# EAGLE board SMPS board (EAGLE 9.6.2)
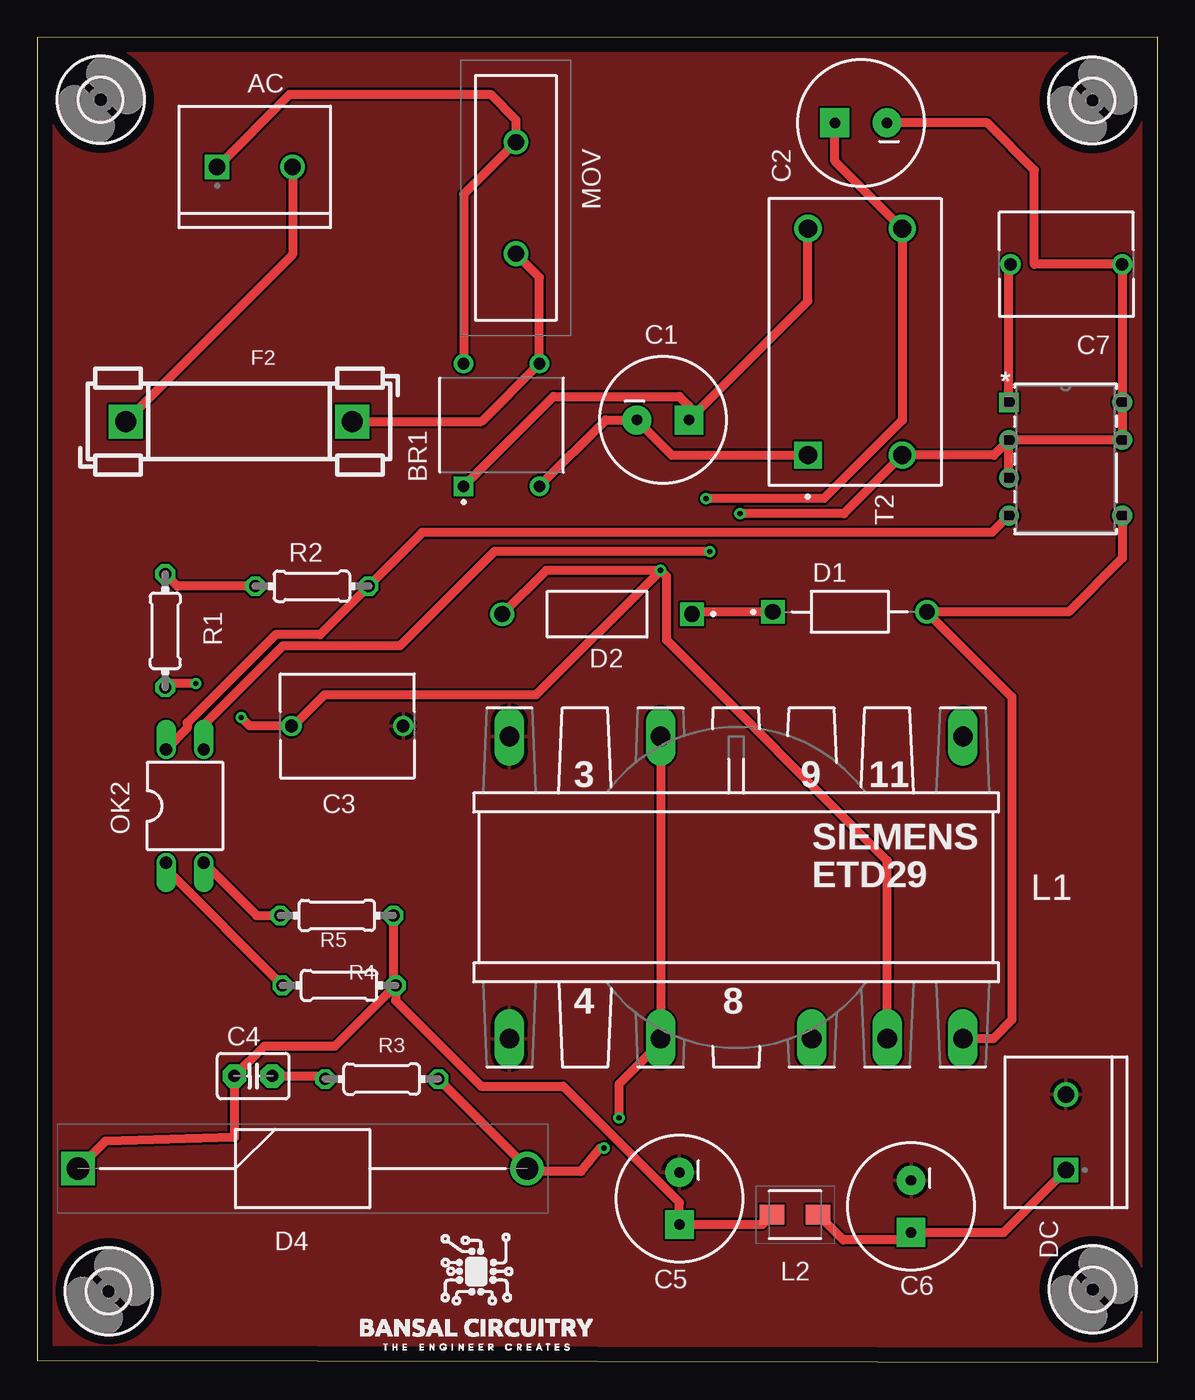
[diagram p0: board, top side]
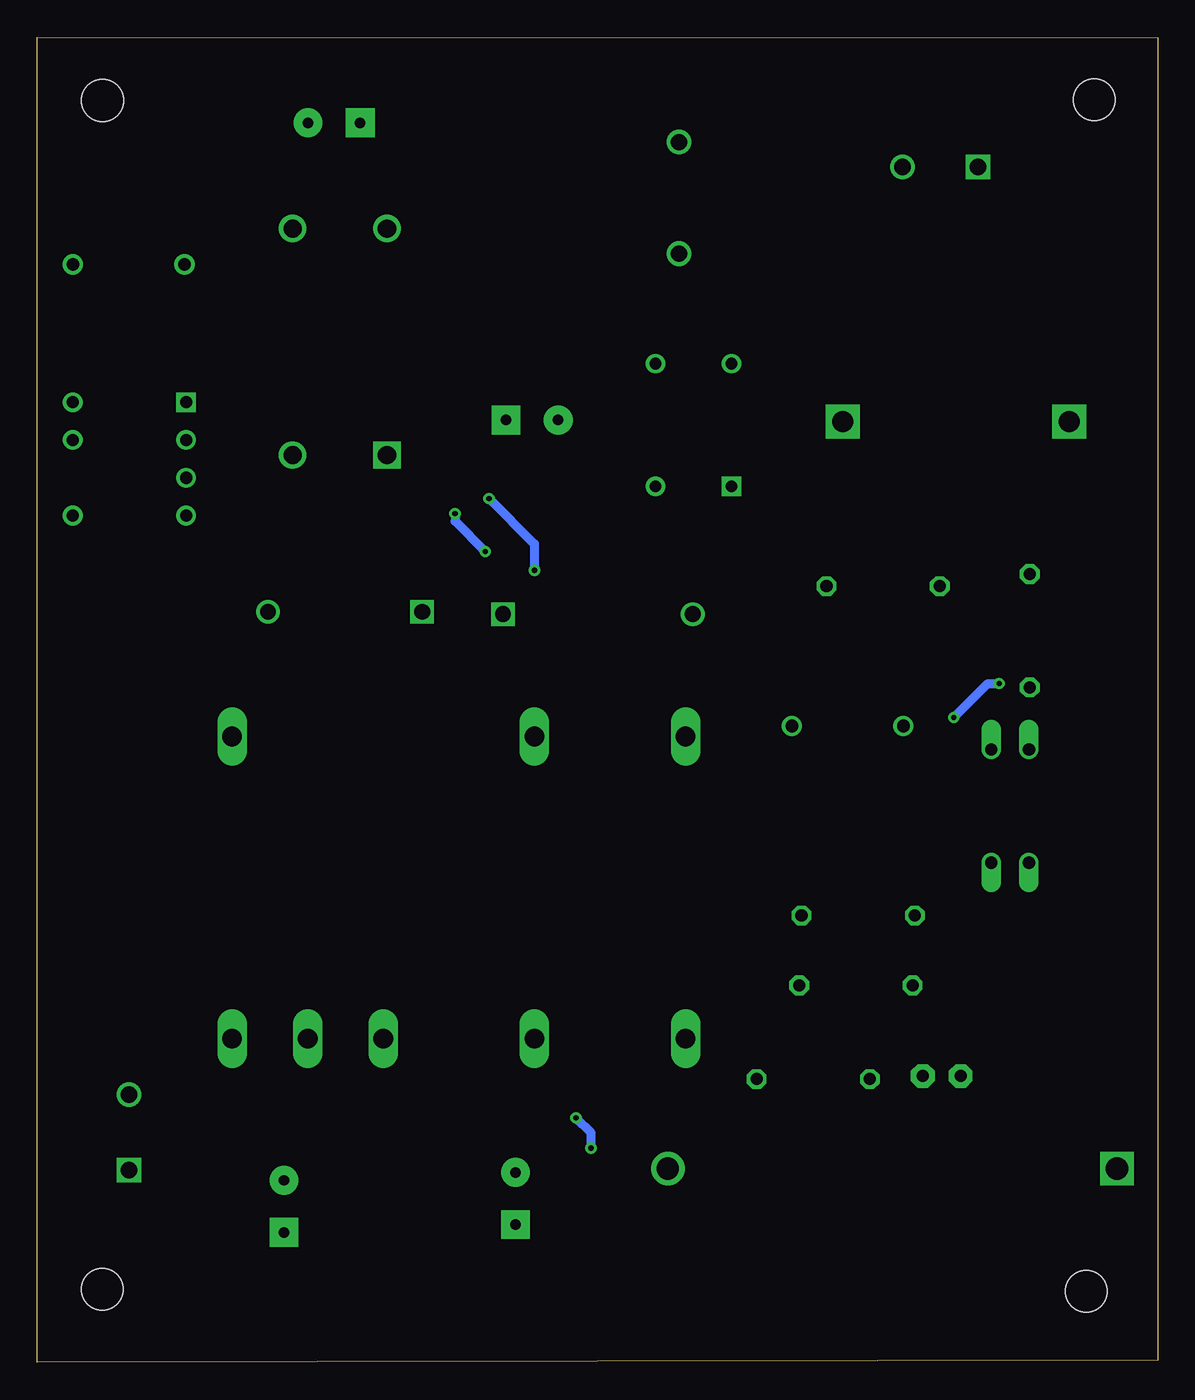
[diagram p1: board, bottom side, seen from below]

Size 75.34 x 89.12 mm. Coordinates in mm from the lower left corner, seen from the top.
Outline: 0,0.13 75.34,0 75.34,89.12 0,89.07 0,0.13
Copper layers (1*16): Top 0.035mm / dielectric 1.5mm / Bottom 0.035mm
Design rules "default": minimum track width 6mil, minimum drill 0.35mm, track to track 6mil, track to pad 6mil, pad to pad 6mil, via to via 6mil, smd to smd 6mil, copper to edge 40mil, drill to drill 6mil, minimum pad ring 10mil, minimum via ring 8mil, stop-mask expansion 4mil, vias tented up to drill 0mil, thermal gap 10mil

## Footprints (pad centres in the part's own frame; a part is rotated, then mirrored left to right if it is on the bottom)
TE_282837-2 = drill 1.1 square: 1 -2.54,0 | drill 1.1: 2 2.54,0
DIP825W50P509L880H320Q4 = drill 0.79 pad 1.14 square: 1 -4.125,2.55 | drill 0.79 pad 1.14: 2 -4.125,-2.55; 3 4.125,-2.55; 4 4.125,2.55
CPOL-RADIAL-1F-2.7V = drill 0.7 pad 1.93 square: + 1.75,0 | drill 0.7 pad 1.93: - -1.75,0
CAP_DE6E3KJ222MN3A = drill 0.85 pad 1.28: 1 -3.75,0; 2 3.75,0
C2.5-3 = drill 0.813 pad 1.6 octagon: 1 -1.27,0; 2 1.27,0
DIOAD1036W78L520D274 = drill 1.06: A 5.18,0 | drill 1.06 square: C -5.18,0
DIOAD1276W78L760D360 = drill 1.06: A 6.38,0 | drill 1.06 square: C -6.38,0
DIOAD3020W130L900D530 = drill 1.5 pad 2.25 square: 1 0,0 | drill 1.5 pad 2.25: 2 30.2,0
FUSE_HOLDER_5X20MM = drill 1.422 pad 2.286 square: 1 0,0; 2 15.24,0
2,8 = hole 2.8: 0,0
ST-D2 = drill 1.321 long: 1 -15.24,10.16; 2 -15.24,-10.16; 5 -5.08,10.16; 6 -5.08,-10.16; 10 5.08,-10.16; 12 10.16,-10.16; 13 15.24,10.16; 14 15.24,-10.16
INDPM3532X200N = smd 1.65 x 1.3: 1 -1.55,0; 2 1.55,0
MOV14D471K = drill 1.1 pad 1.65: 1 -3.75,0; 2 3.75,0
DIL04 = drill 0.813 offset: 1 -1.27,-3.81; 2 1.27,-3.81; 3 1.27,3.81; 4 -1.27,3.81
0204/7 = drill 0.813 octagon: 1 -3.81,0; 2 3.81,0
XFMR_HCTC-4-1.7 = drill 1.219 pad 1.829 square: 1 -7.62,3.175 | drill 1.219 pad 1.829: 2 -7.62,-3.175; 3 7.62,-3.175; 4 7.62,3.175
PDIP-8B_P_PWI = drill 0.813 pad 1.321 square: 1 0,0 | drill 0.813 pad 1.321: 2 0,-2.54; 3 0,-5.08; 4 0,-7.62; 5 7.62,-7.62; 7 7.62,-2.54; 8 7.62,0

## Placement (x,y rotation side)
AC  282837-2  [TE_282837-2]  14.63,80.39 0 top
BR1  DB107  [DIP825W50P509L880H320Q4]  31.22,63.04 90 top
C1  22uF  [CPOL-RADIAL-1F-2.7V]  42.06,63.37 0 top
C2  10uF  [CPOL-RADIAL-1F-2.7V]  55.37,83.36 180 top
C3  472M,2Kv  [CAP_DE6E3KJ222MN3A]  20.85,42.8 0 top
C4  560pF  [C2.5-3]  14.53,19.25 180 top
C5  1500uF  [CPOL-RADIAL-1F-2.7V]  43.18,11.02 270 top
C6  100uF  [CPOL-RADIAL-1F-2.7V]  58.75,10.49 270 top
C7  DE6E3KJ222MN3A  [CAP_DE6E3KJ222MN3A]  69.19,73.84 180 top
D1  UF4007  [DIOAD1036W78L520D274]  54.64,50.47 0 top
D2  P6KE200A  [DIOAD1276W78L760D360]  37.64,50.32 180 top
D4  SR360  [DIOAD3020W130L900D530]  2.74,13.03 0 top
DC  282837-2  [TE_282837-2]  69.16,15.47 90 top
F2  FUSEBLANK_5X20MM  [FUSE_HOLDER_5X20MM]  5.94,63.27 0 top
H1  MOUNT-HOLE2.8  [2,8]  4.8,4.78 0 top
H2  MOUNT-HOLE2.8  [2,8]  70.97,4.9 0 top
H3  MOUNT-HOLE2.8  [2,8]  4.27,84.91 0 top
H4  MOUNT-HOLE2.8  [2,8]  70.94,84.86 0 top
L1  9v,1.2A  [ST-D2]  46.99,31.93 0 top
L2  SRP3020CC-2R2M  [INDPM3532X200N]  50.95,9.93 0 top
MOV  14D471KTR  [MOV14D471K]  32.18,78.31 270 top
OK2  PC817  [DIL04]  9.93,37.41 0 top
R1  1M  [0204/7]  8.61,49.2 270 top
R2  1M  [0204/7]  18.47,52.2 180 top
R3  18 R  [0204/7]  23.16,19.05 0 top
R4  1K  [0204/7]  20.14,30.05 0 top
R5  125R  [0204/7]  20.29,25.35 0 top
T2  HCTC-4-1.7  [XFMR_HCTC-4-1.7]  54.99,68.63 90 top
U1  TNY268PN  [PDIP-8B_P_PWI]  65.33,64.57 0 top

## Library data of the parts
AC DC = terminal; AVAILABILITY: In Stock; CHECK_PRICES: https://www.snapeda.com/parts/282837-2/TE+Connectivity+AMP+Connectors/view-part/?ref=eda; COMMENT: 282837-2; DESCRIPTION: Terminal Block Connector Wire Receptacle 2 5.08 mm 30-16 AWG Green 13.5 A 250 V | TE Connectivity 282837-2; MF: TE Connectivity; MP: 282837-2; PACKAGE: None; PRICE: None; PURCHASE-URL: https://www.snapeda.com/api/url_track_click_mouser/?unipart_id=2549980&manufacturer=TE Connectivity&part_name=282837-2&search_term=None; SNAPEDA_LINK: https://www.snapeda.com/parts/282837-2/TE+Connectivity+AMP+Connectors/view-part/?ref=snap
BR1 = DB107; AVAILABILITY: In Stock; CHECK_PRICES: https://www.snapeda.com/parts/DB107/Rectron/view-part/?ref=eda; DESCRIPTION: Bridge Rectifier Single Phase Standard 1 kV Surface Mount DB-S; MF: Rectron USA; MP: DB107; PACKAGE: SMD-4 Rectron; PRICE: None; SNAPEDA_LINK: https://www.snapeda.com/parts/DB107/Rectron/view-part/?ref=snap
C1 C2 C5 C6 = SparkFun-Capacitors; PROD_ID: CAP-14696
C3 C7 = DE6E3KJ222MN3A; AVAILABILITY: In Stock; CHECK_PRICES: https://www.snapeda.com/parts/DE6E3KJ222MN3A/Murata+Electronics+North+America/view-part/?ref=eda; DESCRIPTION: CAPACITOR, X1/Y2, 2.2NF; Capacitor Application:Safety / Suppression; Capacitance:2200pF; Capacitance Tolerance:± 20%; Voltage Rating:300VAC; Capacitor Mounting:Through Hole; Capacitor Terminals:Radial Leaded; Lead Spacing:7.5mm; Operating Temperature Range:-25°C to +85°C; Body Diameter:9mm; External Depth:7mm; MF: Murata Electronics; MP: DE6E3KJ222MN3A; PACKAGE: NONSTANDARD; PRICE: None; PURCHASE-URL: https://www.snapeda.com/api/url_track_click_mouser/?unipart_id=1663590&manufacturer=Murata Electronics&part_name=DE6E3KJ222MN3A&search_term=None; SNAPEDA_LINK: https://www.snapeda.com/parts/DE6E3KJ222MN3A/Murata+Electronics+North+America/view-part/?ref=snap
C4 = capacitor-wima
D1 = UF4007; AVAILABILITY: In Stock; CHECK_PRICES: https://www.snapeda.com/parts/UF4007/Onsemi/view-part/?ref=eda; DESCRIPTION: Diode Standard 1000 V 1A (DC) Through Hole DO-204AL (DO-41); MF: onsemi; MP: UF4007; PACKAGE: DO-41-2 ONSEMI; PRICE: None; PURCHASE-URL: https://www.snapeda.com/api/url_track_click_mouser/?unipart_id=6596314&manufacturer=onsemi&part_name=UF4007&search_term=None; SNAPEDA_LINK: https://www.snapeda.com/parts/UF4007/Onsemi/view-part/?ref=snap
D2 = P6KE200A; AVAILABILITY: In Stock; CHECK_PRICES: https://www.snapeda.com/parts/P6KE200A/STMicroelectronics/view-part/?ref=eda; DESCRIPTION: 353V Clamp 11.3A (8/20µs) Ipp Tvs Diode Through Hole DO-15 (DO-204AC); MF: STMicroelectronics; MP: P6KE200A; PACKAGE: DO-204 STMicroelectronics; PRICE: None; PURCHASE-URL: https://www.snapeda.com/api/url_track_click_mouser/?unipart_id=4834279&manufacturer=STMicroelectronics&part_name=P6KE200A&search_term=None; SNAPEDA_LINK: https://www.snapeda.com/parts/P6KE200A/STMicroelectronics/view-part/?ref=snap
D4 = SR360; DESCRIPTION: MULTICOMP - SR360 - SCHOTTKY RECTIFIER, 3A, 60V, DO-201AA; HEIGHT: mm; MANUFACTURER_NAME: Multicomp Pro; MANUFACTURER_PART_NUMBER: SR360
F2 = fuse; OC_FARNELL: unknown; OC_NEWARK: unknown
H1-H4 = holes
L1 = trafo-siemens; OC_FARNELL: unknown; OC_NEWARK: unknown
L2 = SRP3020CC-2R2M; DESCRIPTION: Ind,3.5x3.2x1.8mm,2.2uH+/-20%,3.5A,shd; HEIGHT: 2mm; MANUFACTURER_NAME: Bourns; MANUFACTURER_PART_NUMBER: SRP3020CC-2R2M; MOUSER_PART_NUMBER: 652-SRP3020CC-2R2M; MOUSER_PRICE-STOCK: https://www.mouser.co.uk/ProductDetail/Bourns/SRP3020CC-2R2M?qs=1Kr7Jg1SGW95p%2FsB2vUX%252BQ%3D%3D
MOV = MOV-14D471KTR; ARROW_PART_NUMBER: MOV-14D471KTR; ARROW_PRICE-STOCK: https://www.arrow.com/en/products/mov-14d471ktr/bourns?region=nac; DESCRIPTION: BOURNS - MOV-14D471KTR - VARISTOR, METAL OXIDE, 470V, 14MM, 10%; HEIGHT: 20mm; MANUFACTURER_NAME: Bourns; MANUFACTURER_PART_NUMBER: MOV-14D471KTR; MOUSER_PART_NUMBER: 652-MOV-14D471KTR; MOUSER_PRICE-STOCK: https://www.mouser.co.uk/ProductDetail/Bourns/MOV-14D471KTR?qs=CQ3B1E%252BbPs0cifVrEP3vgg%3D%3D
OK2 = optocoupler; MPN: PC817X4J000F; OC_FARNELL: 9707727; OC_NEWARK: 97K7059
R1-R5 = rcl; SPICEPREFIX: R
T2 = CMC; AVAILABILITY: In Stock; CHECK_PRICES: https://www.snapeda.com/parts/HCTC-4-1.7/Bel+Fuse/view-part/?ref=eda; DESCRIPTION: Common Mode Chokes Dual 4000uH 1kHz 1.7A 0.173Ohm DCR Thru-Hole Tray; MF: Bel Fuse; MP: HCTC-4-1.7; PACKAGE: None; PRICE: None; SNAPEDA_LINK: https://www.snapeda.com/parts/HCTC-4-1.7/Bel+Fuse/view-part/?ref=snap
U1 = TNY268PN; COPYRIGHT: Copyright (C) 2024 Ultra Librarian. All rights reserved.; MANUFACTURER_PART_NUMBER: TNY268PN; MFR_NAME: Power Integrations

## Nets
5V,2A: C6.+ DC.1 L2.2
EN: OK2.4 R2.1 U1.4
GND: C3.2 C5.- C6.- DC.2 L1.1 L1.2
N$1: BR1.1 C1.+ T2.4
N$2: BR1.2 C1.- T2.1
N$3: AC.2 F2.1
N$4: BR1.3 F2.2 MOV.2
N$5: AC.1 BR1.4 MOV.1
N$6: C2.- C7.1 OK2.3 T2.2 U1.2 U1.3 U1.7 U1.8
N$7: R1.1 R2.2
N$8: C2.+ C3.1 D2.A L1.12 R1.2 T2.3
N$10: D1.C D2.C
N$11: D1.A L1.14 U1.5
N$12: C7.2 U1.1
N$14: D4.2 L1.5 L1.6 R3.2
N$16: C4.2 C5.+ D4.1 L2.1 R4.2 R5.2
N$17: C4.1 R3.1
N$19: OK2.1 R5.1
OUTPUT: OK2.2 R4.1

## Tracks (layer width: path | path; a pad name or v marks a point on that pad's centre or on a via)
5V,2A
  Top 0.61: L2.2 54.2,8.23 58.24,8.23 C6.+ 64.98,8.74 DC.1
EN
  Top 0.61: U1.4 64.19,55.8 25.88,55.8 R2.1 19.02,48.95 16.02,48.95 10.08,43.01 10.08,42.65 OK2.4
GND
  pour Top: -1.27,90.35 76.2,90.35 76.2,-1.09 -1.27,-1.09
N$1
  Top 0.61: BR1.1 34.7,64.95 43.18,64.95 43.81,64.32 C1.+ 51.82,71.38 T2.4
N$2
  Top 0.61: BR1.2 38.22,63.37 C1.- 42.68,61.01 T2.1
N$3
  Top 0.61: AC.2 17.17,74.5 F2.1
N$4
  Top 0.61: F2.2 29.87,63.27 BR1.3 33.77,72.97 MOV.2
N$5
  Top 0.61: AC.1 16.97,85.27 30.48,85.27 32.18,83.57 MOV.1 28.67,78.54 BR1.4
N$6  (via drill 0.35)
  Top 0.61: U1.2 U1.7 U1.8 C7.1 67.05,73.84 67.05,80.19 63.87,83.36 C2.- | U1.2 64.31,61.01 T2.2 54.23,57.07 v47.24,57.07 | U1.3 U1.2 | v45.21,54.53 30.73,54.53 24.38,48.18 16.51,48.18 11.2,42.87 OK2.3
  Bottom 0.61: v47.24,57.07 47.24,56.57 v45.21,54.53
N$7
  Top 0.61: R2.2 9.42,52.2 R1.1
N$8  (via drill 0.35)
  Top 0.61: C2.+ 53.62,80.79 T2.3 58.17,63.36 52.89,58.09 v44.96,58.09 | v41.91,53.26 34.21,53.26 D2.A | v41.91,53.26 33.53,44.88 19.3,44.88 17.22,42.8 C3.1 14.28,42.8 v13.72,43.36 | v41.91,53.26 42.31,52.86 42.31,48.57 57.15,33.73 L1.12 | v10.67,45.64 8.87,45.64 R1.2
  Bottom 0.61: v44.96,58.09 41.91,55.04 v41.91,53.26 | v13.72,43.36 11.43,45.64 v10.67,45.64
N$10
  Top 0.61: D1.C 44.18,50.47 D2.C
N$11
  Top 0.61: U1.5 72.95,54.08 69.34,50.47 D1.A 65.53,44.75 65.53,23.04 64.26,21.77 L1.14
N$12
  Top 0.61: U1.1 65.33,73.73 C7.2
N$14  (via drill 0.35)
  Top 0.61: L1.5 L1.6 41.91,21.51 | 41.91,21.26 41.91,21.51 | R3.2 32.94,13.08 D4.2 33.14,12.83 36.55,12.83 37.83,14.4 v38.1,14.4 | v39.12,16.43 39.12,18.72 41.91,21.51
  Bottom 0.61: v38.1,14.4 38.1,15.42 v39.12,16.43
N$16
  Top 0.61: R4.2 23.95,25.5 R5.2 | R5.2 20.02,21.26 15.26,21.26 C4.2 13.26,15.12 4.58,14.87 D4.1 | R5.2 24.1,24.31 29.84,18.57 35.36,18.57 43.18,10.75 C5.+ 48.75,9.27 L2.1
N$17
  Top 0.61: C4.1 19.15,19.25 R3.1
N$19
  Top 0.61: OK2.1 8.66,33.17 R5.1
OUTPUT
  Top 0.61: OK2.2 14.76,30.05 R4.1

## Text on the board
_tplace: * | 3 | 9 | 11 | SIEMENS | ETD29 | 4 | 8